# EAGLE board line_sensor_board (EAGLE 7.2.0)
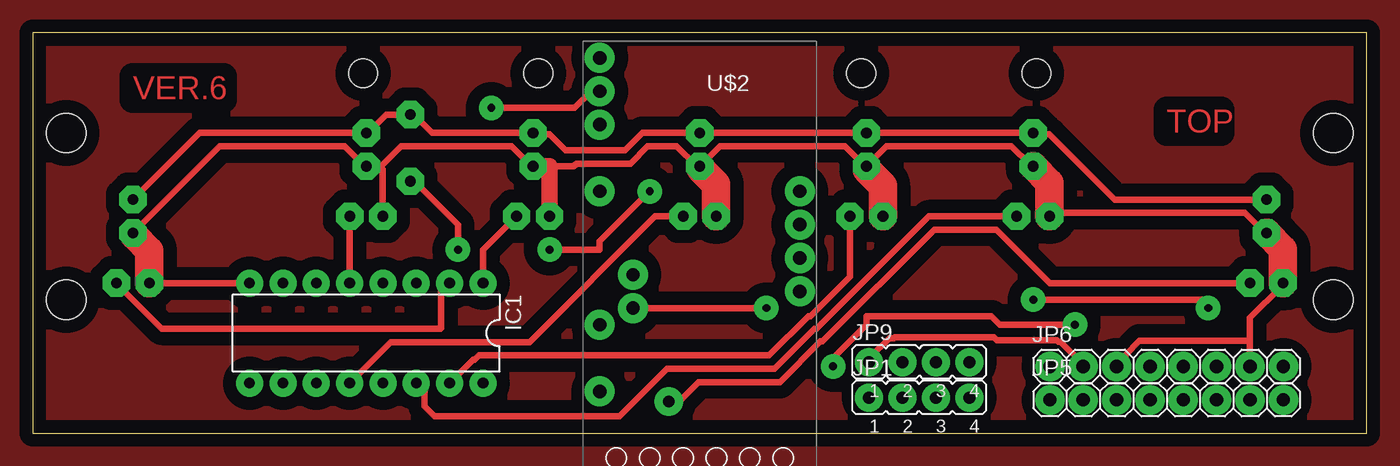
[diagram p0: board, top side]
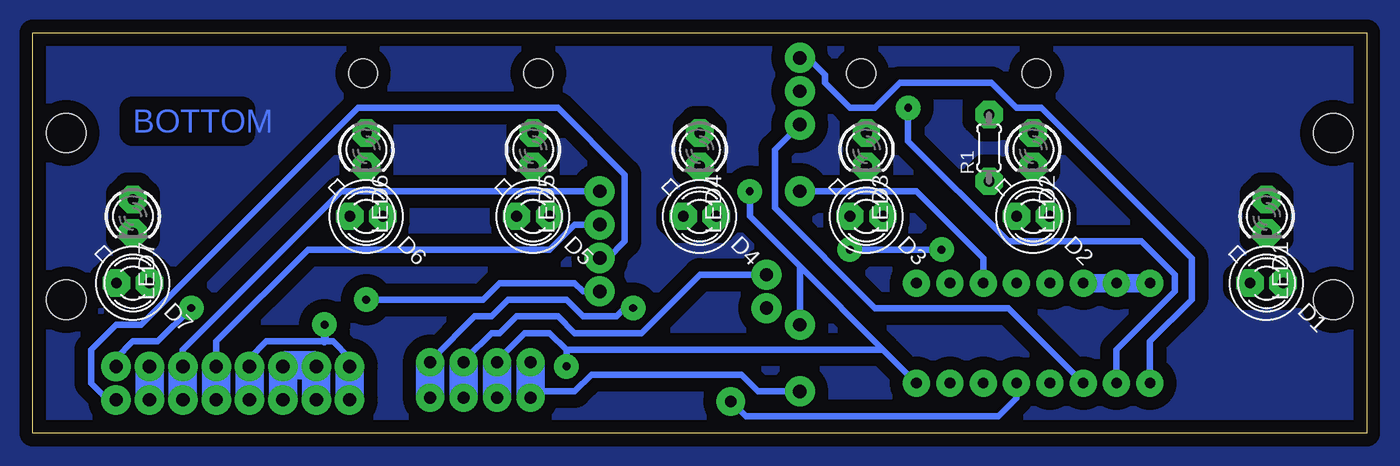
[diagram p1: board, bottom side, seen from below]

Size 101.6 x 30.48 mm. Coordinates in mm from the lower left corner, seen from the top.
Outline: 0,0 101.6,0 101.6,30.48 0,30.48 0,0
Copper layers (1*16): Top 0.035mm / dielectric 1.5mm / Bottom 0.035mm
Design rules "default *": minimum track width 0.5mm, minimum drill 0.6mm, track to track 1mm, track to pad 0.7mm, pad to pad 0.7mm, via to via 0.7mm, smd to smd 0.05mm, copper to edge 1mm, drill to drill 0.5mm, minimum pad ring 0.55mm, minimum via ring 0.5mm, stop-mask expansion 4mil, vias tented up to drill 0mil, thermal gap 0.05mm
Holes 3 mm at 2.54,22.86 2.54,10.16 99.06,10.16 99.06,22.86
Holes 2.2 mm at 25.15,27.41 38.5,27.4 63.1,27.41 76.45,27.4
Milling: 4 lines

## Footprints (pad centres in the part's own frame; a part is rotated, then mirrored left to right if it is on the bottom)
BPX65 = drill 0.813 octagon: A -0.889,-0.889; K 0.889,0.889
DIL16 = drill 0.813 long: 1 -8.89,-3.81; 2 -6.35,-3.81; 3 -3.81,-3.81; 4 -1.27,-3.81; 5 1.27,-3.81; 6 3.81,-3.81; 7 6.35,-3.81; 8 8.89,-3.81; 9 8.89,3.81; 10 6.35,3.81; 11 3.81,3.81; 12 1.27,3.81; 13 -1.27,3.81; 14 -3.81,3.81; 15 -6.35,3.81; 16 -8.89,3.81
JP4 = drill 0.914 long: 1 -3.81,0; 2 -1.27,0; 3 1.27,0; 4 3.81,0
1X08 = drill 1.016 long: 1 -8.89,0; 2 -6.35,0; 3 -3.81,0; 4 -1.27,0; 5 1.27,0; 6 3.81,0; 7 6.35,0; 8 8.89,0
LED3MM = drill 0.813 octagon: A -1.27,0; K 1.27,0
0204/5 = drill 0.813 octagon: 1 -2.54,0; 2 2.54,0
ARDUINO_PRO_MINI = drill 1.016 pad 1.88: 5 -7.62,2.54; 6 -7.62,0; 7 -7.62,-2.54; 8 -7.62,-5.08; 13 7.62,-15.24; 14 7.62,-12.7; 15 7.62,-10.16; 17 7.62,-5.08; 21 7.62,5.08; 23 7.62,10.16; A4 5.08,1.27; A5 5.08,3.81

## Placement (x,y rotation side)
D1  BPX65  [BPX65]  7.62,11.43 315 bottom
D2  BPX65  [BPX65]  25.4,16.51 315 bottom
D3  BPX65  [BPX65]  38.1,16.51 315 bottom
D4  BPX65  [BPX65]  50.8,16.51 315 bottom
D5  BPX65  [BPX65]  63.5,16.51 315 bottom
D6  BPX65  [BPX65]  76.2,16.51 315 bottom
D7  BPX65  [BPX65]  93.98,11.43 315 bottom
IC1  4051N  [DIL16]  25.4,7.62 180 top
JP1  [JP4]  67.51,2.71 0 top
JP5  [1X08]  86.36,2.54 0 top
JP6  [1X08]  86.36,5.08 0 top
JP9  [JP4]  67.51,5.41 0 top
LED1  [LED3MM]  7.62,16.51 270 bottom
LED2  [LED3MM]  25.4,21.59 270 bottom
LED3  [LED3MM]  38.1,21.59 270 bottom
LED4  [LED3MM]  50.8,21.59 270 bottom
LED5  [LED3MM]  63.5,21.59 270 bottom
LED6  [LED3MM]  76.2,21.59 270 bottom
LED7  [LED3MM]  93.98,16.51 270 bottom
R1  [0204/5]  28.77,21.72 90 bottom
U$2  ARDUINO_PRO_MINI  [ARDUINO_PRO_MINI]  50.8,13.34 180 top

## Library data of the parts
D1-D7 = opto-trans-siemens; MPN: BPX65.; OC_FARNELL: 327451; OC_NEWARK: 06WX2764
IC1 = 40xx
JP1 JP9 = jumper
JP5 JP6 = pinhead
LED1-LED7 = led
R1 = rcl
U$2 = SparkFun-Boards

## Nets
A1: IC1.11 U$2.15
A2: IC1.10 U$2.14
A3: IC1.9 U$2.13
B1: D7.K IC1.13
B2: D6.K IC1.14
B3: D5.K IC1.15
B4: D4.K IC1.12
B5: D3.K IC1.1
B6: D2.K IC1.5
B7: D1.K IC1.2
GND: D1.A D2.A D3.A D4.A D5.A D6.A D7.A IC1.6 IC1.7 IC1.8 JP1.1 JP5.2 JP5.3 JP5.7 JP6.2 JP6.3 JP6.7 JP9.1 LED1.K LED2.K LED3.K LED4.K LED5.K LED6.K LED7.K U$2.23
N$1: IC1.3 U$2.17
N$2: JP1.3 JP9.3 U$2.A4
N$3: JP1.4 JP9.4 U$2.A5
N$4: JP5.5 JP6.5 U$2.7
N$5: JP5.6 JP6.6 U$2.8
N$6: JP5.8 U$2.6
N$7: LED1.A LED2.A LED3.A LED4.A LED5.A LED6.A LED7.A R1.2
N$9: JP6.8 U$2.5
VCC: IC1.16 JP1.2 JP5.1 JP5.4 JP6.1 JP6.4 JP9.2 R1.1 U$2.21

## Tracks (layer width: path | path; a pad name or v marks a point on that pad's centre or on a via)
A1
  Bottom 0.5: IC1.11 27.3,9.53 37.47,9.53 45.09,17.14 45.09,21.59 U$2.15
A2  (via drill 0.6)
  Top 0.5: v34.92,24.77 41.27,24.77 42.55,26.04 U$2.14
  Bottom 0.5: IC1.10 19.05,6.35 14.61,10.79 14.61,12.06 17.14,14.61 27.3,14.61 34.92,22.23 v34.92,24.77
A3
  Bottom 0.5: IC1.9 16.51,6.99 13.34,10.16 13.34,13.34 24.77,24.77 26.67,24.77 28.57,26.67 35.56,26.67 37.47,24.77 39.37,24.77 41.27,26.67 41.27,27.3 42.55,28.57 U$2.13
B1  (via drill 0.9)
  Top 0.5: D7.K 77.47,11.43 73.41,15.49 68.66,15.49 60.15,6.99 59.99,6.99 56.9,3.89 50.72,3.89 49.25,2.41 v48.44,2.41
  Bottom 0.5: v48.44,2.41 47.3,1.27 28.07,1.27 26.67,2.67 IC1.13
B2
  Top 0.5: D6.K 68.25,16.51 59.69,7.95 59.54,7.95 56.49,4.9 48.31,4.9 44.7,1.29 43.84,1.29 43.81,1.27 42.55,1.27 42.52,1.29 41.25,1.29 41.22,1.27 30.61,1.27 29.84,2.03 29.84,3.81 IC1.14
B3
  Top 0.5: D5.K 62.23,11.91 59.23,8.91 59.08,8.91 56.08,5.92 33.98,5.92 33.66,5.59 33.53,5.59 IC1.15
B4
  Top 0.5: IC1.12 27.25,6.93 37.82,6.93 47.4,16.51 D4.K
B5
  Top 0.5: IC1.1 34.29,13.97 D3.K
B6
  Top 0.5: IC1.5 D2.K
B7
  Top 0.5: D1.K 6.38,11.43 6.38,11.38 9.8,7.95 31.06,7.95 31.11,8 31.11,10.79 IC1.2
GND
  Top 0.5: 95.22,11.43 D7.A 95.12,11.2 92.71,8.79 92.71,7.04 | 92.71,7.04 JP6.7 | 77.44,16.51 D6.A 77.67,16.76 92.33,16.76 93.75,15.34 LED7.K | LED6.K 75.97,20.42 74.55,21.84 65.02,21.84 LED5.K 63.27,20.42 61.85,21.84 52.32,21.84 LED4.K | 52.05,16.51 D4.A | 50.9,20.09 LED4.K | 39.37,20.32 41.2,20.32 41.4,20.52 45.52,20.52 46.84,21.84 49.05,21.84 50.55,20.34 LED4.K | 26.54,20.32 LED2.K 25.17,20.42 23.75,21.84 14.25,21.84 7.64,15.24 LED1.K 7.75,15.01 | 26.54,20.32 28.07,21.84 36.45,21.84 37.87,20.42 LED3.K | 64.75,16.51 D5.A | D3.A | D2.A 26.64,16.51 26.64,20.09 26.54,20.32 | 8.87,11.43 D1.A IC1.8 | JP6.3 83.21,5.74 83.21,5.94 84.3,7.04 92.71,7.04 | JP9.1 63.78,5.66 63.78,5.77 65.25,7.24 65.58,7.24 65.66,7.32 73.2,7.32 73.43,7.09 78,7.09 78.13,6.96 78.28,6.96 79.93,5.31 JP6.2
  Top 1.27: LED3.K 39.37,20.32 D3.A
  Top 1.778: 63.52,20.07 LED5.K
  Top 2.184: 95.22,11.43 95.22,13.99 LED7.K | 77.44,16.51 77.44,19.07 LED6.K | 52.05,16.51 52.05,18.95 50.9,20.09 | 64.75,16.51 64.75,18.85 63.52,20.07 | 8.87,11.43 8.87,13.89 7.75,15.01
  Bottom 0.5: 82.32,5.18 JP6.3 | 80.24,5.18 JP6.2 | U$2.23 46.35,3.17 47.62,4.45 59.05,4.45 60.33,3.17 63.5,3.17 JP1.1
  Bottom 1: JP9.1
  Bottom 1.422: IC1.8 IC1.7 IC1.6
  Bottom 2.184: JP6.7 JP5.7 | JP6.3 JP5.3 | JP6.2 JP5.2 | 80.24,5.18 82.32,5.18 | JP9.1 JP1.1
N$1
  Bottom 0.5: IC1.3 29.21,13.34 34.29,18.41 U$2.17
N$2
  Bottom 0.5: U$2.A4 50.8,12.06 55.24,7.62 60.33,7.62 61.59,8.89 64.77,8.89 66.04,7.62 66.67,7.62 68.58,5.71 JP9.3
  Bottom 1: JP9.3
  Bottom 2.184: JP9.3 JP1.3
N$3  (via drill 0.6)
  Top 0.5: v55.88,9.53 U$2.A5
  Bottom 0.5: v55.88,9.53 56.52,9.53 57.15,8.89 59.69,8.89 60.96,10.16 65.41,10.16 66.67,8.89 67.94,8.89 71.12,5.71 JP9.4
  Bottom 1: JP9.4
  Bottom 2.184: JP9.4 JP1.4
N$4
  Bottom 0.5: U$2.7 60.33,15.88 62.23,13.97 80.64,13.97 87.63,6.99 JP6.5
  Bottom 2.184: JP6.5 JP5.5
N$5
  Bottom 0.5: U$2.8 78.11,18.41 90.17,6.35 JP6.6
  Bottom 2.184: JP6.6 JP5.6
N$6
  Bottom 0.5: U$2.6 57.78,13.34 56.52,14.61 56.52,19.68 61.59,24.77 76.83,24.77 93.34,8.26 95.25,8.26 97.16,6.35 97.16,3.81 95.89,2.54 JP5.8
N$7
  Top 0.5: LED1.A 12.7,22.86 LED2.A 25.63,22.96 26.9,24.23 28.75,24.23 R1.2 29.03,24.23 30.4,22.86 LED3.A 38.33,22.76 39.34,22.76 40.56,21.54 45.11,21.54 46.43,22.86 LED4.A LED5.A LED6.A 76.43,22.76 77.44,22.76 82.42,17.78 LED7.A
N$8
  pour Bottom: -3.5,33.98 -3.5,-3.5 105.1,-3.5 105.1,33.98
N$9  (via drill 0.6)
  Top 0.5: v76.2,10.16 89.53,10.16 v89.53,9.53
  Bottom 0.5: U$2.5 59.69,10.79 60.33,11.43 66.04,11.43 67.31,10.16 v76.2,10.16 | v89.53,9.53 92.08,6.99 93.98,6.99 95.25,5.71 JP6.8
N$10
  pour Top: -3.5,33.98 -3.5,-3.5 105.1,-3.5 105.1,33.98
VCC  (via drill 0.6)
  Top 0.5: v32.38,13.97 32.38,15.88 29.21,19.05 R1.1 | v39.37,13.97 43.18,13.97 43.18,14.61 v46.99,18.41 | v79.38,8.26 73.66,8.26 73.03,8.89 63.5,8.89 63.5,8.26 60.96,5.71 v60.96,5.08
  Bottom 0.5: JP6.1 77.47,5.71 78.74,6.99 79.38,6.99 83.82,6.99 85.09,5.71 JP6.4 | v39.37,13.97 v32.38,13.97 | v46.99,18.41 46.99,16.51 43.18,12.7 | U$2.21 43.18,12.7 | 43.18,12.7 36.83,6.35 | 36.83,6.35 IC1.16 | 60.96,6.35 62.23,7.62 64.14,7.62 66.04,5.71 JP9.2 | 36.83,6.35 60.96,6.35 | 60.96,6.35 v60.96,5.08
  Bottom 0.61: v79.38,8.26 79.38,6.99
  Bottom 1: JP9.2
  Bottom 2.184: JP6.1 JP5.1 | JP6.4 JP5.4 | JP9.2 JP1.2

## Text on the board
Top: VER.6 | TOP
Bottom: BOTTOM